# Altium PCB ddrlegobrick.PcbDoc (part 2 of 2)
Units mm, origin at the board's own origin, x right, y up, seen from the top; angles counter-clockwise.
Board outline 62 x 30 mm, 4 copper layers (TOP_PWR, POWER, SHIELD_GND, SIGNAL), stack 0.603 mm thick; 97 components, 81 nets, 416 pads, 74 vias.
Unrouted connection lines stored in the file: 270.
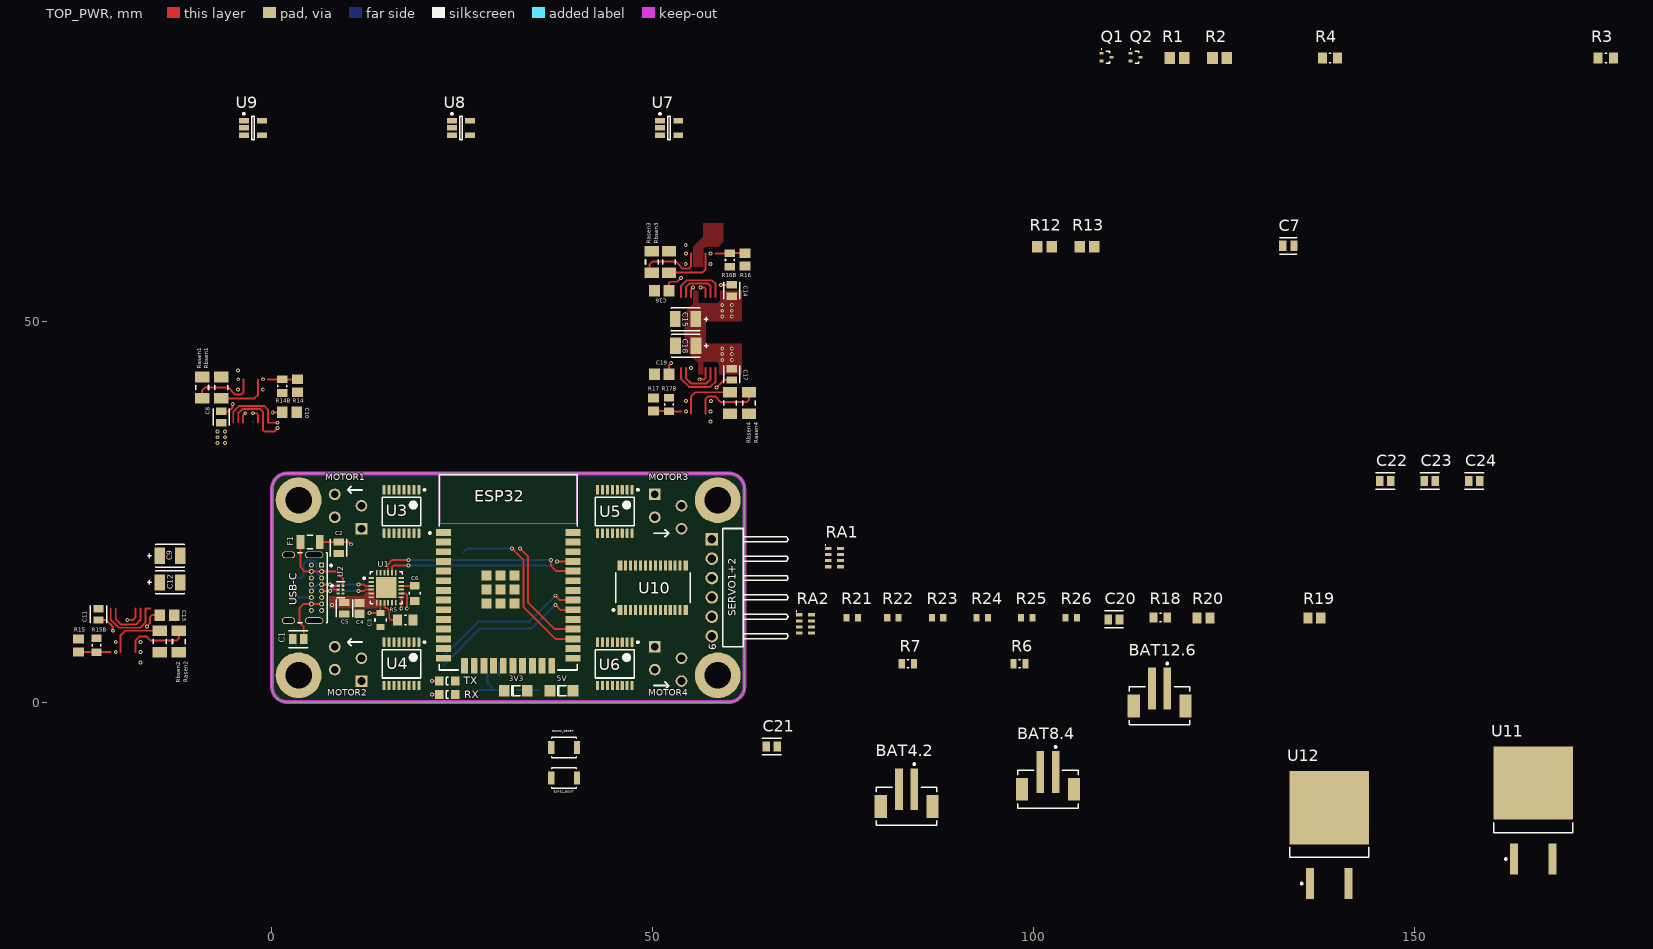
[diagram p0: TOP_PWR view]

## Via types
v1: diameter 0.508, hole 0.254, TOP_PWR to SIGNAL, 74 vias

## Nets (pads, with @x,y where several pads share a name; then routed paths per layer and width w, separated by ;. In a path a pad name is that pad's centre, name@x,y a point inside that pad or via, vN(x,y) a via of type N, cw(c..) or ccw(c..) an arc to the next point about the centre after c; other vN are vias at no path point) (continued)
NetRbsen3_2: (continued)
  TOP_PWR w0.254: Rbsen3.2 56.45,56.35 56.925,56.825 56.925,58.85
NetRbsen4_2: Rbsen4.2 U6.3 | length 7.6
  TOP_PWR w0.254: 54.975,37.85 54.975,40.075 55.55,40.65 Rbsen4.2
NetRusb1_2: Rusb1.2 USB-C.A5 | length 8
  SIGNAL w0.254: Rusb1.2 3.825,16.275 4.15,16.6 4.15,18.15 4.6,18.6 5.5,18.6 5.85,18.25 5.85,16.95 USB-C.A5
NetRusb2_2: Rusb2.2 USB-C.B5 | length 3
  SIGNAL w0.254: Rusb2.2 USB-C.B5
pca9685_a0: R21.1 RA1.8 U10.1
pca9685_a1: R22.1 RA1.7 U10.2
pca9685_a2: R23.1 RA1.6 U10.3
pca9685_a3: R24.1 RA1.5 U10.4
pca9685_a4: R25.1 RA2.8 U10.5
pca9685_a5: R26.1 RA2.7 U10.24
RESET: ESP32.3 ESP32_RESET.2 Q1.3 R12.1
RX-LED: RX.1 U1.13 | length 15.4
  TOP_PWR w0.254: v1(16.975,12.275) U1.13 ; v1(21,1) RX.1
  SHIELD_GND w0.254: v1(16.975,12.275) 16.975,5.025 v1(21,1)
SERVO1_PWM: R19.2 SERVO1+2.3
SERVO2_PWM: R20.2 SERVO1+2.6
TX-LED: TX.1 U1.14 | length 14.9
  TOP_PWR w0.254: U1.14 16.977,14.248 17.502,14.248 17.7,14.05 v1(17.7,12.25) ; v1(21,2.75) TX.1
  SHIELD_GND w0.254: v1(17.7,12.25) 17.7,5.3 20.25,2.75 v1(21,2.75)
UART_DTR: Q2.2 R1.2 U1.23
UART_RTS: Q1.2 R2.2 U1.19
USB_M: U1.4 U2.2 USB-C.A7 USB-C.B7 | length 9.4
  TOP_PWR w0.254: USB-C.A7 v1(7.6,14.575) 7.775,14.75 U2.2 ; v1@11.375,14.575 12.075,14.575 12.25,14.75 U1.4
  SHIELD_GND w0.254: USB-C.B7 6.025,14.575 USB-C.A7
  SIGNAL w0.254: v1(7.6,14.575) v1(11.35,14.575)
USB_P: U1.3 U2.1 USB-C.A6 USB-C.B6 | length 9.4
  TOP_PWR w0.254: USB-C.A6 v1(7.625,15.425) 7.8,15.25 U2.1 ; v1(11.375,15.425) 12.075,15.425 12.25,15.25 U1.3
  SIGNAL w0.254: USB-C.B6 6.025,15.425 USB-C.A6 ; v1(7.625,15.425) v1(11.375,15.425)
pads on no net: ESP32.4 ESP32.5 ESP32.6 ESP32.7 ESP32.13 ESP32.14 ESP32.16 ESP32.17 ESP32.18 ESP32.19 ESP32.20 ESP32.21 ESP32.22 ESP32.23 ESP32.24 ESP32.26 ESP32.32 U1.1 U1.10 U1.11 U1.12 U1.15 U1.17 U1.18 U1.22 U1.24 U2.3 U2.5 U3.8 U4.8 U5.8 U6.8 U7.1 U7.4 U7.5 U8.1 U8.4 U8.5 U9.1 U9.4 U9.5 U10.8 U10.9 U10.10 U10.11 U10.12 U10.13 U10.15 U10.16 U10.17 U10.18 U10.19 U10.20 U10.21 U10.22 U13.4 USB-C.A8 USB-C.B8
copper on no net: | length 0
  SIGNAL w0.254: -16.638,11.412 -16.625,11.4

## Polygon pours and split planes (outlines as drawn)
+3V3 on TOP_PWR "+3V3_L01_P033" (solid, pour order 33): 7.5,13.9 11.85,13.9 12.45,14.5 13.5,14.5 13.5,13.5 14,13.5 14,12.5 13.8,12.3 7.5,12.3
MOTOR3_CHB on TOP_PWR "MOTOR3_CHB_L01_P031" (solid, pour order 31): 55.3,57.1 55.3,59.75 56.6,61.05 56.6,62.85 59.25,62.85 59.25,60.45 58.55,59.75 56.85,59.75 56.6,59.5 56.6,57.1
BAT_PACK_12V6 on TOP_PWR "TOP_PWR-BAT_PACK_12V6" (solid, pour order 30): 56.6,43 55.95,43 55.95,44.55 54.15,46.35 54.15,51.1 55.3,52.25 55.3,54 55.95,54 55.95,52.45 56.05,52.35 58.55,52.35 58.85,52.65 58.85,54 61.65,54 61.65,49.95 56.9,49.95 56.9,47.05 61.65,47.05 61.65,43 58.7,43 58.7,44.4 58.45,44.65 56.7,44.65 56.6,44.55
MOTOR3_CHA on POWER "MOTOR3_CHA_L02_P032" (solid, pour order 32): 57.95,60.35 57.95,57.1 54.1,57.1 53.85,57.35 53.85,62.85 56.6,62.85 56.6,60.85 57.1,60.35

## Keep-outs
Keep-Out Layer:
  the board outline again, w0.5

## Silkscreen, mask and mechanical layers (free items; w line width, h text height)
Bottom Overlay:
  drawing of 2921 lines, arcs and shapes, not listed

## Text inside footprints (layer, text, board x,y; h text height)
SERVO1+2: Top Overlay "6" at 58.3,6.81 h1.02 r90